# Altium PCB PCB1.PcbDoc
Units mm, origin at the board's own origin, x right, y up, seen from the top; angles counter-clockwise.
Board outline 76.9 x 63.5 mm, 2 copper layers (Top Layer, Bottom Layer); 16 components, 17 nets, 76 pads, 5 vias.
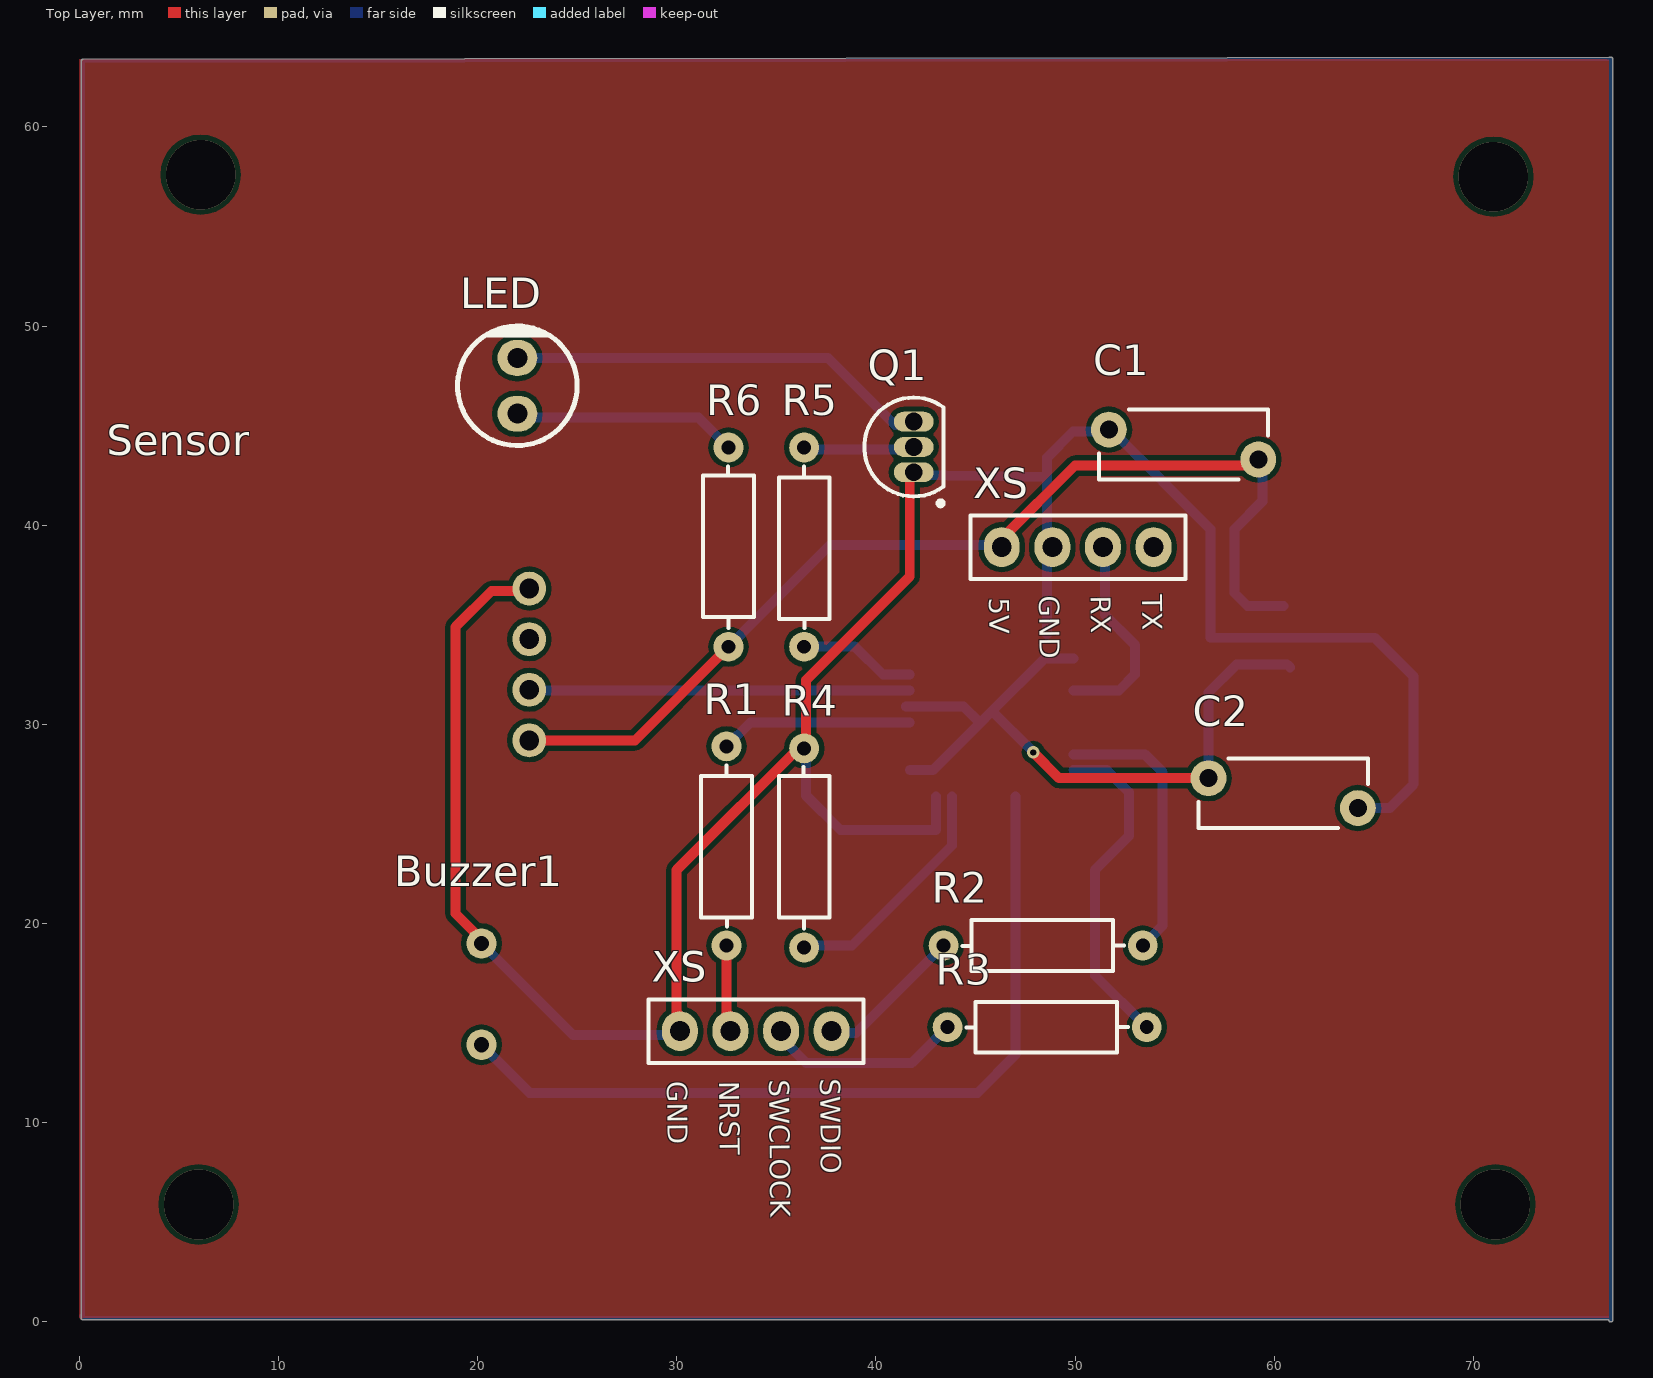
[diagram p0: Top Layer view]
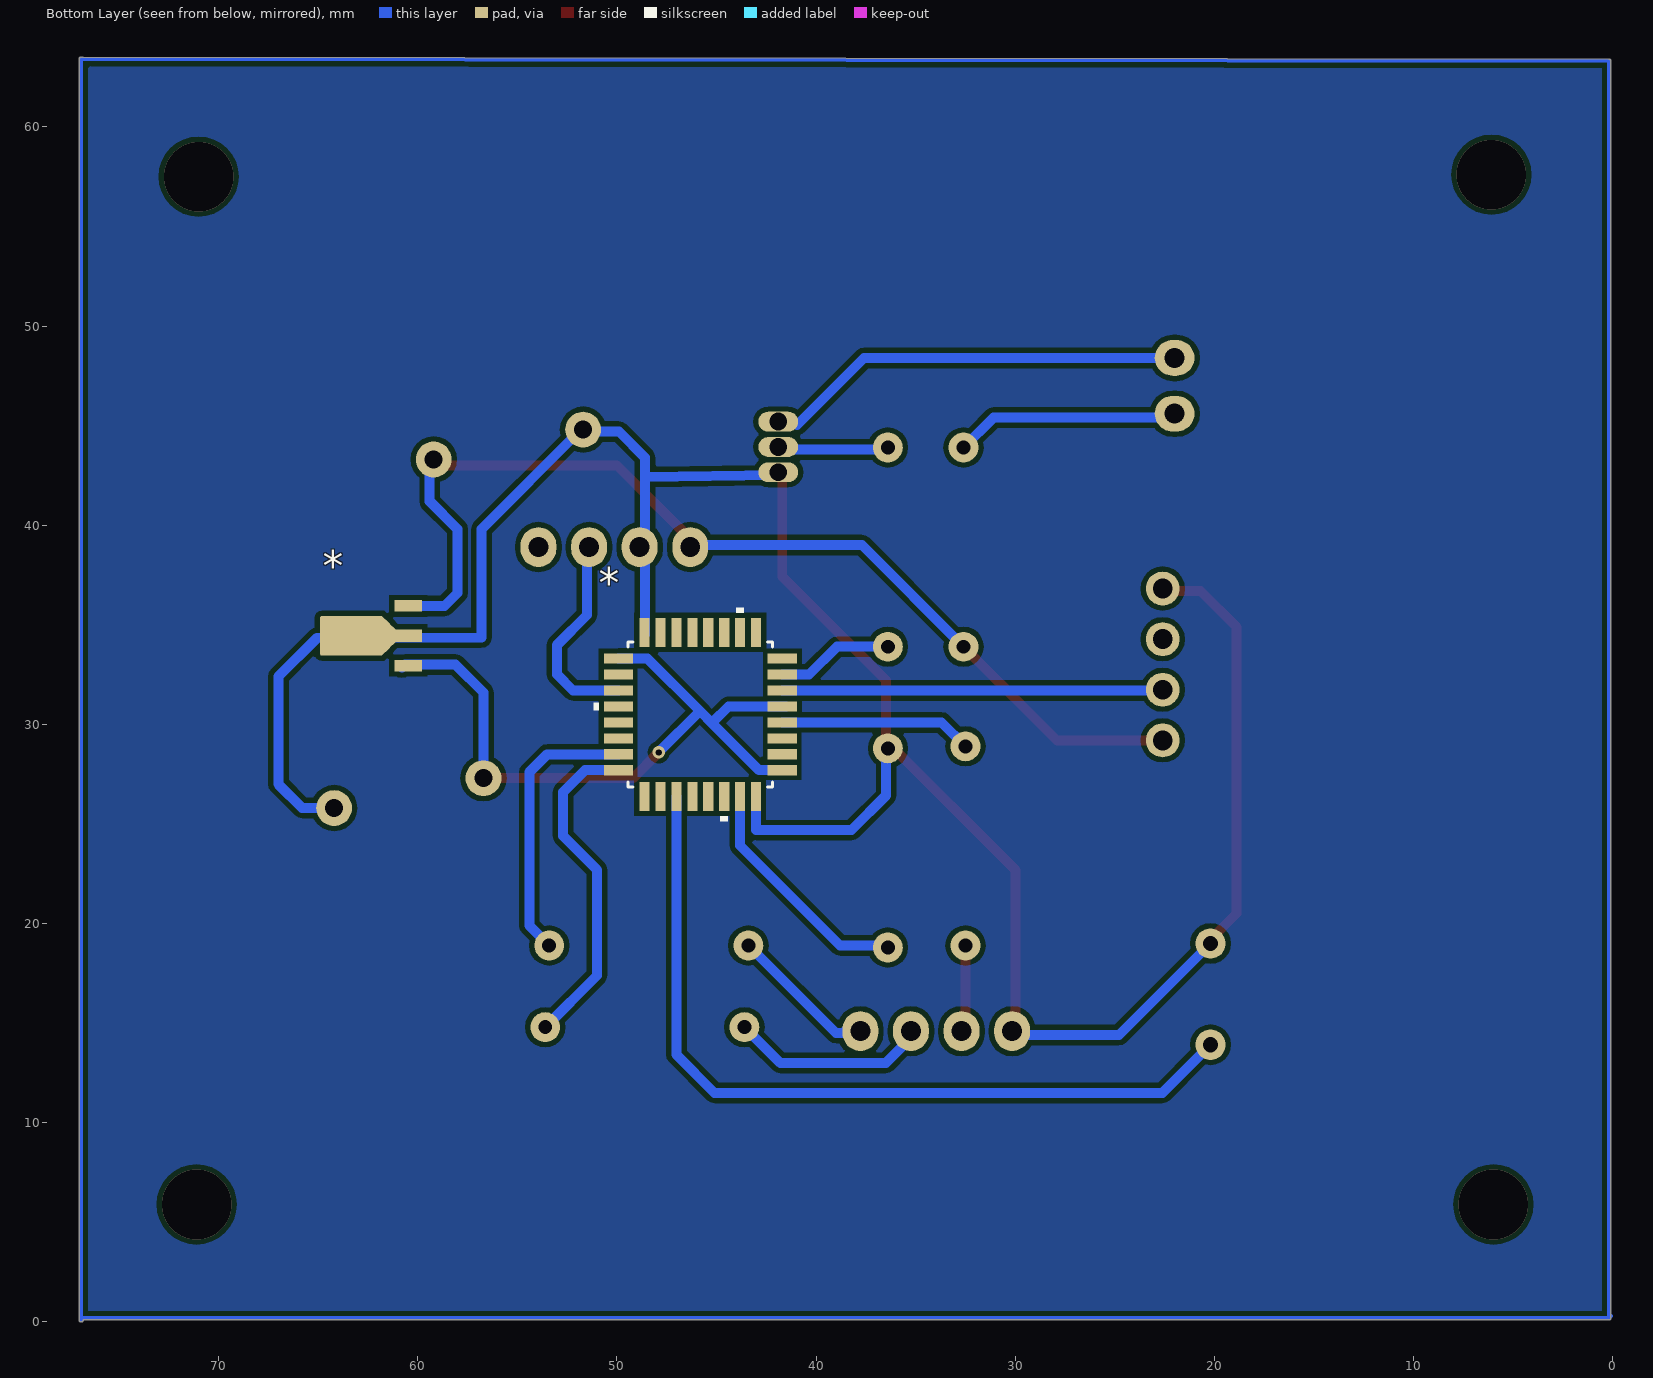
[diagram p1: Bottom Layer view, seen from below]
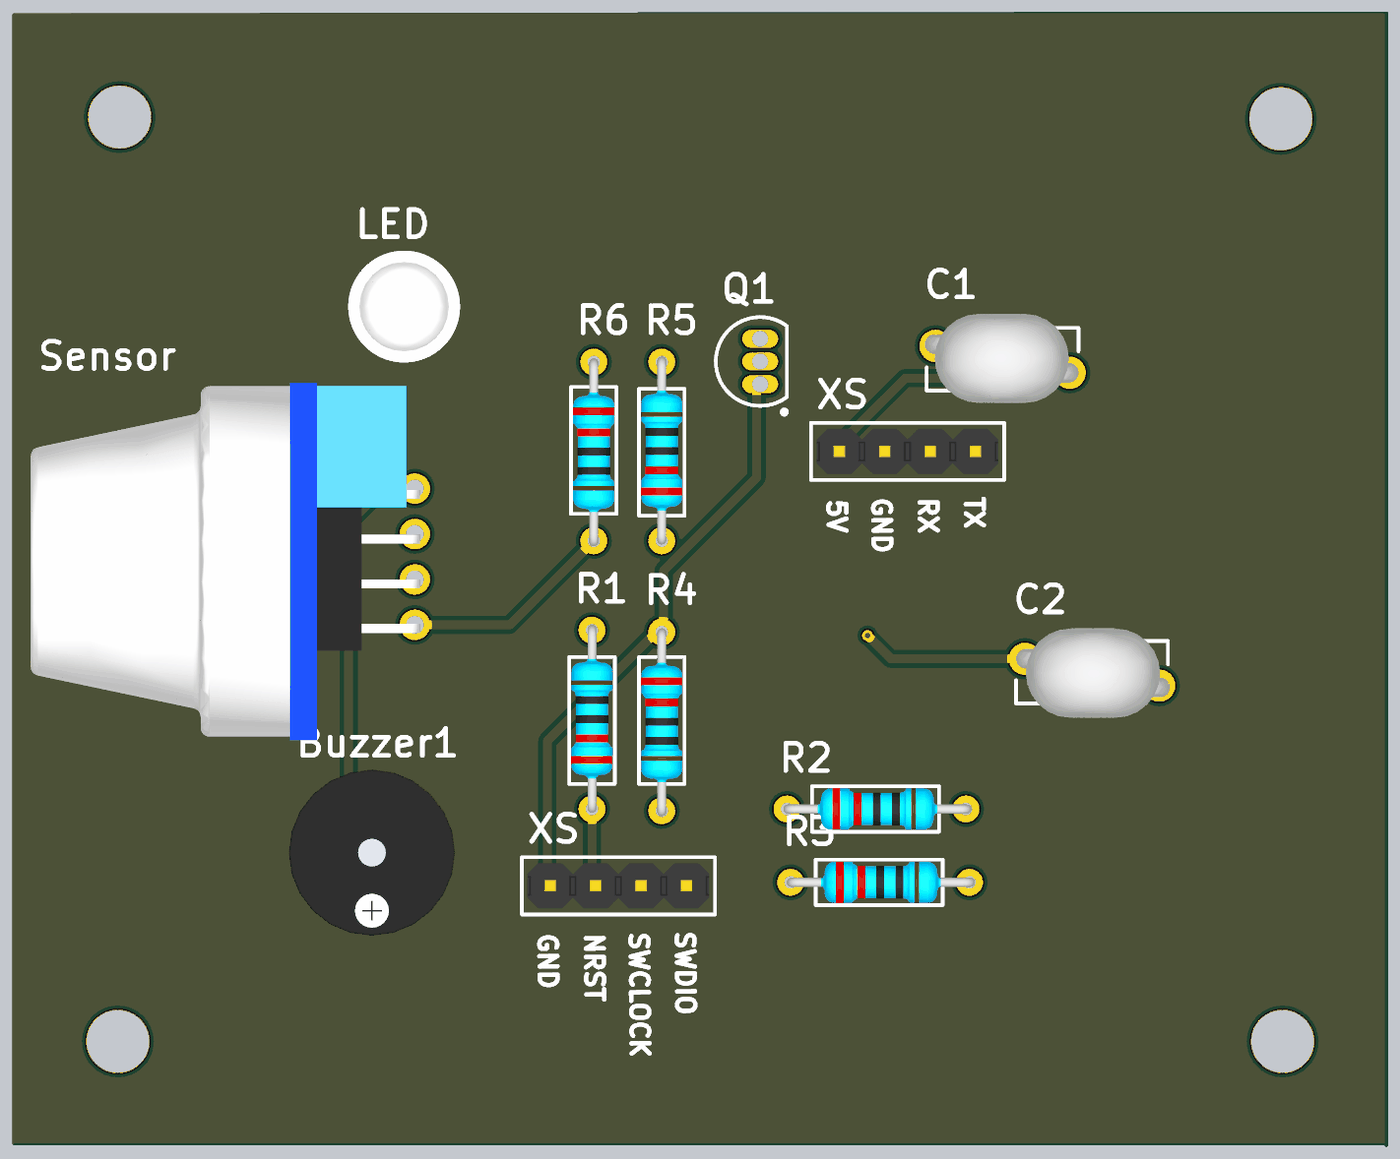
[diagram p2: 3D render of the assembled board from above, using the file's embedded part models]

## Layer stack, top to bottom
Top Solder: solder mask 0.0102, Solder Resist, Dk 3.5
Top Layer: signal copper 0.0356
Dielectric 1: dielectric 0.32, FR-4, Dk 4.8
Bottom Layer: signal copper 0.0356
Bottom Solder: solder mask 0.0102, Solder Resist, Dk 3.5

## Board outline
0.1,0.2 0.1,63.3 cw(c0.2,63.3) 0.2,63.401 76.8,63.501 cw(c76.8,63.4) 76.85,63.487 cw(c76.9,63.4) 77,63.4 77,0.1 cw(c76.9,0.1) 76.8,0.1 0.2,0.1 cw(c0.2,0.2)

## Design rules (kind name [scope] priority, off if disabled: settings)
Clearance [All] p1: gap=0.252 ignorepadtopadclearanceinfootprint=FALSE
PolygonConnect [All] p1: connectstyle=Relief reliefconductorwidth=0.254 reliefentries=4 polygonreliefangle="90 Angle" airgapwidth=0.254
RoutingVias [All] p1: holewidth=1 width=2 viastyle="Through Hole" minholewidth=0.8 minwidth=1.6 maxholewidth=2 maxwidth=4
SolderMaskExpansion [All] p1: expansion=0.102
UnRoutedNet [All] p1: checkbadconnections=TRUE
Width [All] p1: maxlimit=1 minlimit=0.254 preferedwidth=0.5 minimp=50.000000 maximp=50.000000 favimp=50.000000
29 further rules are at their usual default settings.

## Components (designator, comment, footprint, x,y, rotation, side; value= is the part's Value field where it differs from the comment)
* "STAB" STAB 60.475,32.95 r90 bottom
* "MPU" PCBComponent_1 45.942,30.373 r0 bottom
Buzzer1 "Buzzer" "Buzzer 3V" 20.2,13.92 r90 top
C1 "Film capacitor, 10μF, 450VDC, ±10%, 10.9mOhm, 31.5x15 mm, -40...+105°C" "CAP: AY2102M29Y5US63L7" 59.2,43.3 r180 top value=10?F
C2 "Film capacitor, 10μF, 450VDC, ±10%, 10.9mOhm, 31.5x15 mm, -40...+105°C" "CAP: AY2102M29Y5US63L7" 56.7,27.3 r0 top value=10?F
LED "LED" LED 22,49.5 r270 top
Q1 "BC547A" TO-92A 41.9,43.93 r0 top
R1 "Resistor (hole)" "Resistor 22" 32.5,28.9 r270 top
R2 "Resistor (hole)" "Resistor 22" 53.4,18.9 r180 top
R3 "Resistor (hole)" "Resistor 22" 53.6,14.8 r180 top
R4 "Resistor (hole)" "Resistor 22" 36.4,18.8 r90 top
R5 "Resistor (hole)" "Resistor 22" 36.4,43.9 r270 top
R6 "Resistor (hole)" "Resistor 22" 32.6,33.9 r90 top
Sensor "Component_1" Sensor 22.6,29.2 r90 top
XS "ST-Link" ST_Link 37.78,14.6 r180 top
XS "UART" UART 53.94,38.9 r180 top

## Footprints (in the part's own frame and the unit in brackets; to place one, negate y for a bottom-side part, rotate by r counter-clockwise, add the part's x,y. Pads: shape width x height; smd on the part's side, far side on the other; paste and mask are expansions set on the pad)
"Buzzer 3V" [mil]
  round 60 hole 30: 1(0,0) 2(200,0)
  body extent -83,-183 283,183, height 230
"CAP: AY2102M29Y5US63L7" [mm]
  round 1.8 hole 0.9: 1(0,0) 2(7.5,-1.5)
  silkscreen extent -0.5,-2.5 8,1, body extent -0.5,-3.3 8.1,1.7, height 10.75
LED [mm]
  oval 1.8x2 hole 1: 1(3.9,0) 2(1.1,0)
  silkscreen extent -0.5,-3 5.5,3, body extent 0,-3 5.5,3, height 8.8
PCBComponent_1 [mil]
  rect 57.56x19.97 smd paste+0 mask+0: 1(-167,105.24) 2(-167,73.74) 3(-167,42.25) 4(-167,10.75) 5(-167,-20.75) 6(-167,-52.24) 7(-167,-83.74) 8(-167,-115.23) 17(157,-115.23) 18(157,-83.74) 19(157,-52.24) 20(157,-20.75) 21(157,10.75) 22(157,42.25) 23(157,73.74) 24(157,105.24)
  rect 19.97x57.56 smd paste+0 mask+0: 9(-115.24,-167) 10(-83.74,-167) 11(-52.24,-167) 12(-20.75,-167) 13(10.75,-167) 14(42.24,-167) 15(73.74,-167) 16(105.24,-167) 25(105.24,157) 26(73.74,157) 27(42.24,157) 28(10.75,157) 29(-20.75,157) 30(-52.24,157) 31(-83.74,157) 32(-115.24,157)
  silkscreen extent -148,-216 206,206, body extent -182,-182 172,172, height 63
"Resistor 22" [mm]
  round 1.5 hole 0.7: 1(0,0) 2(10,0)
  silkscreen extent 0.95,-1.28 9.05,1.27, body extent -0.3,-1.17 10.2,1.17, height 2.86
Sensor [mm]
  round 1.7 hole 1: 1(0,0) 2(2.54,0) 3(5.08,0) 4(7.62,0)
  body extent -6.45,-0.27 13.55,21.47, height 31
ST_Link [mm]
  oval 1.8x2 hole 1: 1(0,0) 2(2.54,0) 3(5.08,0) 4(7.62,0)
  silkscreen extent -1.6,-1.6 9.2,1.6, body extent -1.27,-1.27 8.89,1.27, height 8.6
STAB [mm]
  rect 0.57x1.4 smd: 1(0,0) 3(3,0)
  oct 1.3x2.45 smd: 2(1.15,2.225) 2(1.225,2.15) 2(1.5,1.875) 2(1.775,2.15) 2(1.85,2.225)
  rect 0.65x1.4 smd: 2(1.5,0)
  rrect10% 2x3.125 smd: 2(1.5,2.875)
  body extent -0.75,-0.47 3.75,3.63, height 1.5
TO-92A [mm] "TO, Flat Index; 3 In-Line, Axial Leads; Body Dia. 4.5mm; Leads 0.51 x 0.48 mm (max)"
  oval 2x1 hole 0.9: 1(0,-1.27) 2(0,0) 3(0,1.27)
  silkscreen extent -2.48,-2.95 1.5,2.48, body extent -2.48,-2.5 1.5,2.5, height 6.86
UART [mm]
  oval 1.8x2 hole 1: 1(0,0) 2(2.54,0) 3(5.08,0) 4(7.62,0)
  silkscreen extent -1.6,-1.6 9.2,1.6, body extent -1.27,-1.27 8.89,1.27, height 8.6

## Part data
*: library part Component_1
C1 C2: library part Film, Manufacturer=Epcos, Package="31.5x15 mm", PartNumber=B32774D4106K000, Temperature=-40...+105°C, Tolerance=±10%, TypeCapacitor="Film capacitor", ValueManufacturerPartNumber="Film capacitor, 10?F, 450VDC, ±10%, 10.9mOhm, 31.5x15 mm, -40...+105°C", Voltage=450VDC, HelpURL=https://www.digikey.com/products/en/capacitors/film-capacitors/62?k=&pkeyword=&sv=0&pv2097=1958&sf=0&FV=fffc01ef%2C1f140000%2Cffe0003e%2Cffec6366&quantity=1&ColumnSort=1000011&page=1&stock=1&pageSize=25, Impedance=10.9mOhm
Q1: library part 2N3904, "NPN General Purpose Amplifier", ComponentLink1Description="Manufacturer Link", ComponentLink1URL=http://www.fairchildsemi.com/, ComponentLink2Description=Datasheet, ComponentLink2URL=http://www.fairchildsemi.com/ds/2N%2F2N3904.pdf, DatasheetVersion=1997, LatestRevisionDate=15-Jan-2003, LatestRevisionNote="PCB Footprint 'BCY-W3/D4.7' replaced", PackageDescription="TO, Flat Index; 3 In-Line, Axial Leads; Body Dia. 4.5mm; Leads 0.51 x 0.48 mm (max)", PackageReference=TO-92A, PackageVersion=Sep-1998, Published=8-Jun-2000, Publisher="Altium Limited"

## Via types
v1: diameter 3.5, hole 3.5, Top Layer to Bottom Layer, 4 vias
v2: diameter 0.61, hole 0.305, Top Layer to Bottom Layer, 1 vias

## Nets (pads, with @x,y where several pads share a name; then routed paths per layer and width w, separated by ;. In a path a pad name is that pad's centre, name@x,y a point inside that pad or via, vN(x,y) a via of type N, cw(c..) or ccw(c..) an arc to the next point about the centre after c; other vN are vias at no path point)
+3.3V: *.1 *.5 *.17 C2.1 | length 36
  Top Layer w0.5: v2(47.9,28.6) 49.2,27.3 C2.1
  Bottom Layer w0.5: *.5@41.5,30.9 *.5 44.4,30.9 45.161,30.14 45.161,30 ; *.1@41.7,27.7 42.861,27.7 45.161,30 ; v2(47.9,28.6) 47.9,28.614 45.837,30.677 ; *.17 48.461,33.3 45.837,30.677 ; C2.1 56.7,31.6 58.1,33 60.65,33 *.1@60.8,32.85 ; 45.161,30 45.837,30.677
+5V: *.3@60.475,35.95 C1.1 R6.1 Sensor.1 XS.4@46.32,38.9 | length 53
  Top Layer w0.5: Sensor.1 27.9,29.2 R6.1 ; XS.4@46.32,38.9 46.32,39.32 50,43 C1.1@59.1,43
  Bottom Layer w0.5: R6.1@32.36,33.66 R6.1 37.7,39 XS.4@46.32,39 ; C1.1 59.4,43.1 59.4,41.2 58,39.8 58,36.6 58.65,35.95 *.3@60.475,35.95
GND: *.2@60.475,34.45 *.2@62.7,34.1 *.2@62.7,34.8 *.2@62.35,34.45 *.2@62.625,34.175 *.2@62.625,34.725 *.2@63.35,34.45 *.16 *.32 Buzzer1.2 C1.2 C2.2 Q1.1 R4.2 Sensor.4 XS.3@48.86,38.9 XS.4@30.16,14.6 | length 127.8
  Top Layer w0.5: Buzzer1.2@20.1,19.3 18.9,20.5 18.9,34.9 20.7,36.7 Sensor.4@22.4,36.7 ; XS.4@30.22,15.3 30,15.52 30,22.7 36.5,29.2 36.5,32.23 41.7,37.43 41.7,42.5 42.1,42.5 Q1.1@42.13,42.53
  Bottom Layer w0.5: Buzzer1.2 24.8,14.4 XS.4@30.22,14.4 ; R4.2@36.5,28.8 36.5,26.419 38.218,24.7 43.015,24.7 *.32 ; Q1.1@41.701,42.53 41.898,42.527 48.599,42.419 ; *.16@48.6,34.515 48.6,43.4 49.9,44.7 51.9,44.7 56.8,39.8 56.8,34.35 62.35,34.35 65.05,34.35 67,32.4 67,27 65.8,25.8 C2.2
Net*_4: *.4 R1.1 | length 10
  Bottom Layer w0.5: R1.1@32.5,29.2 R1.1 33.7,30.1 *.4
Net*_6: *.6 Sensor.2 | length 19.3
  Bottom Layer w0.5: Sensor.2@22.4,31.7 *.6
Net*_7: *.7 R5.2 | length 5.9
  Bottom Layer w0.5: R5.2 38.95,33.9 40.35,32.5 *.7
Net*_23: *.23 R2.1 | length 14
  Bottom Layer w0.5: *.23 53.5,28.5 54.4,27.6 54.4,19.9 R2.1
Net*_24: *.24 R3.1 | length 16.8
  Bottom Layer w0.5: *.24 51.6,27.7 52.7,26.6 52.7,24.4 51,22.7 51,17.4 R3.1
Net*_27: *.27 Buzzer1.1 | length 41.6
  Bottom Layer w0.5: Buzzer1.1 22.62,11.5 45.1,11.5 47.015,13.415 *.27
Net*_31: *.31 R4.1 | length 11.9
  Bottom Layer w0.5: R4.1@36.5,18.9 38.8,18.9 43.815,23.915 *.31
NetLED_1: LED.1 R6.2 | length 11.6
  Bottom Layer w0.5: LED.1@21.6,45.4 31.1,45.4 R6.2
NetLED_2: LED.2 Q1.3 | length 21.5
  Bottom Layer w0.5: LED.2@22,48.6 22.2,48.4 37.6,48.4 40.963,45.037 41.758,45.235 Q1.3@41.7,45
NetQ1_2: Q1.2 R5.1 | length 4.8
  Bottom Layer w0.5: R5.1 36.5,43.8 Q1.2@41.2,43.8
NetR1_2: R1.2 XS.3@32.7,14.6 | length 3.7
  Top Layer w0.5: R1.2 32.5,15.516 32.642,15.399 XS.3@32.76,15.3
NetR2_2: R2.2 XS.1@37.78,14.6 | length 7.7
  Bottom Layer w0.5: XS.1@37.84,15.3 38.64,14.5 39,14.5 R2.2
NetR3_2: R3.2 XS.2@35.24,14.6 | length 10.6
  Bottom Layer w0.5: XS.2@35.3,15.3 35.3,14.2 36.5,13 41.8,13 R3.2
UART1_TX: *.19 XS.2@51.4,38.9 | length 10.5
  Bottom Layer w0.5: *.19 52.2,31.7 53,32.5 53,34 51.5,35.5 XS.2@51.5,39
pads on no net: *.2@41.7,28.5 *.3@41.7,29.3 *.8 *.9 *.10 *.11 *.12 *.13 *.14 *.15 *.18 *.20 *.21 *.22 *.25 *.26 *.28 *.29 *.30 Sensor.3 XS.1@53.94,38.9
copper on no net: | length 279.9
  Bottom Layer w0.2: 0.1,0.3 0.2,0.2 ; 76.8,63.4 0.2,63.3 0.2,56.6 0.2,0.2 ; 76.9,63.4 76.9,0.1 76.8,0.2 0.2,0.2
  other v1: 6,5.9 71.1,5.9 71,57.5 6.1,57.6

## Polygon pours and split planes (outlines as drawn)
no net on Top Layer (solid, pour order 4): 0,63.4 76.7,63.4 76.8,63.5 76.8,0.2 0.2,0.2 0.1,0.1 0,0.2
no net on Bottom Layer (solid, pour order 6): 0.2,63.3 76.8,63.3 76.9,63.4 76.9,0.1 0,0.1 0.2,0.3

## Text inside footprints (layer, text, board x,y; h text height)
XS: Top Overlay "NRST" at 32.136,12.074 h1 r270.56; Top Overlay "GND" at 29.536,12.074 h1 r270.56; Top Overlay "SWCLOCK" at 34.636,12.149 h1 r270.56; Top Overlay "SWDIO" at 37.211,12.199 h1 r270.56
XS: Top Overlay "TX" at 53.372,36.499 h1 r270.56; Top Overlay "RX" at 50.797,36.449 h1 r270.56; Top Overlay "GND" at 48.197,36.449 h1 r270.56; Top Overlay "5V" at 45.697,36.349 h1 r270.56